# Altium PCB PCB1.PcbDoc
Units mm, origin at the board's own origin, x right, y up, seen from the top; angles counter-clockwise.
Board outline 30.37 x 71.9 mm, 2 copper layers (Top Layer, Bottom Layer); 9 components, 10 nets, 27 pads, 7 vias.
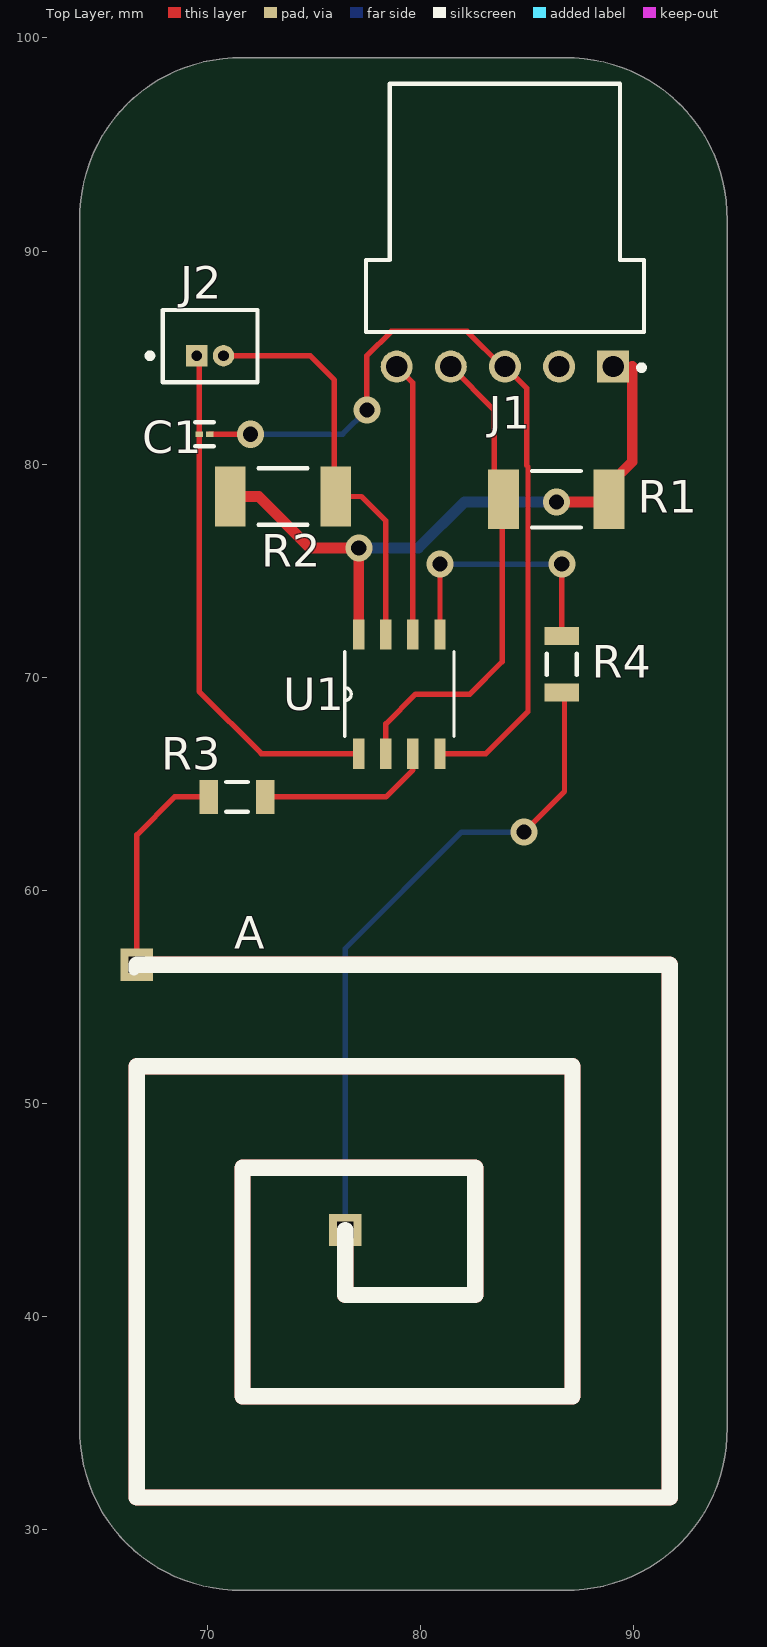
[diagram p0: Top Layer view]
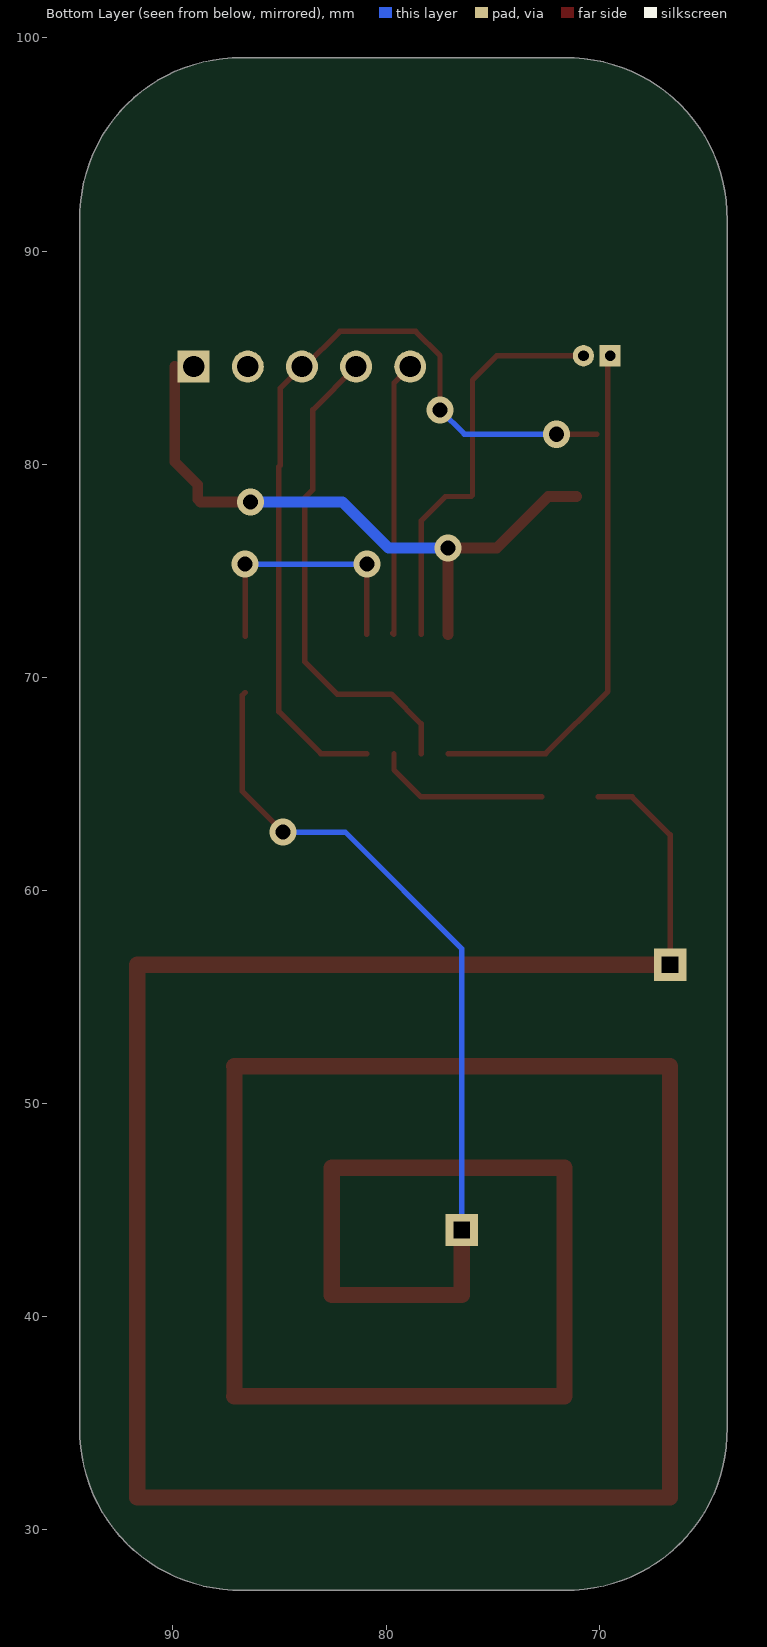
[diagram p1: Bottom Layer view, seen from below]
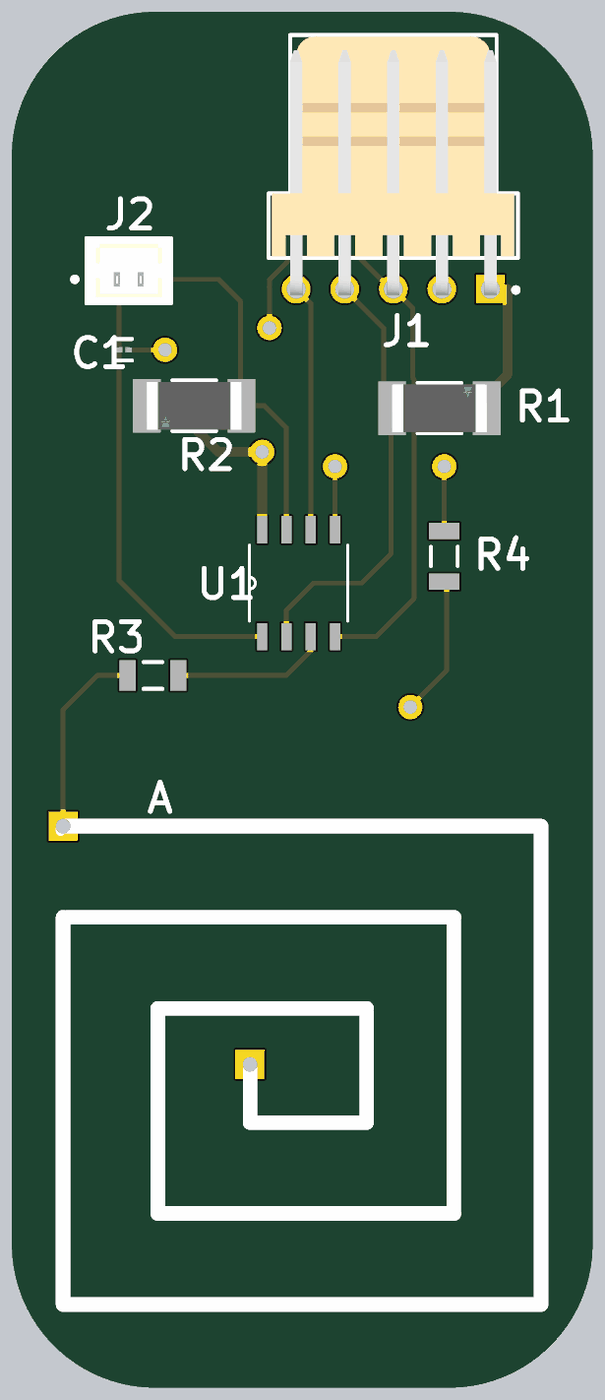
[diagram p2: 3D render of the assembled board from above, using the file's embedded part models]

## Layer stack, top to bottom
Top Solder: solder mask 0.0102, Solder Resist, Dk 3.5
Top Layer: signal copper 0.0356
Dielectric 1: dielectric 0.32, FR-4, Dk 4.8
Bottom Layer: signal copper 0.0356
Bottom Solder: solder mask 0.0102, Solder Resist, Dk 3.5

## Board outline
63.999,34.8 ccw(c71.501,34.671) 71.628,27.169 86.739,27.169 ccw(c86.868,34.671) 94.37,34.798 94.37,91.438 ccw(c86.868,91.567) 86.741,99.069 71.63,99.069 ccw(c71.501,91.567) 63.999,91.44

## Design rules (kind name [scope] priority, off if disabled: settings)
Clearance [All] p1: gap=0.254 ignorepadtopadclearanceinfootprint=FALSE except(0: Arc-Hole Track-Hole SMDPad-Hole THPad-Hole Via-Hole Fill-Hole Poly-Hole Region-Hole Text-Hole)
PolygonConnect [All] p1: connectstyle=Relief reliefconductorwidth=0.254 reliefentries=4 polygonreliefangle="90 Angle" airgapwidth=0.254
RoutingVias [All] p1: holewidth=0.711 width=1.27 viastyle="Through Hole" minholewidth=0.711 minwidth=1.27 maxholewidth=0.711 maxwidth=1.27
SolderMaskExpansion [All] p1: expansion=0.102 istentingtop=FALSE
Width [All] p1: maxlimit=0.254 minlimit=0.254 preferedwidth=0.254
30 further rules are at their usual default settings.

## Components (designator, comment, footprint, x,y, rotation, side; value= is the part's Value field where it differs from the comment)
A "Antena" Antena2 66.675,56.515 r0 top
C1 "CL03B103KQ3NNNC" FP-CL03-IPC_C 69.85,81.407 r180 top
J1 "61900511021" 61900511021 83.947,92.032 r180 top
J2 "53047-0210" FP-53047-0210-MFG 70.114,85.54 r180 top
R1 "CRCW201020K0FKEF" FP-CRCW2010-e3-MFG 86.36,78.359 r0 top
R2 "CRCW201020K0FKEF" FP-CRCW2010-e3-MFG 73.533,78.486 r180 top
R3 "RC1206FR-071RL" RESC3116X65X40LL10T20 71.374,64.389 r180 top
R4 "RC1206FR-071RL" RESC3116X65X40LL10T20 86.614,70.612 r270 top
U1 "M24LR64-RMN6/2" SOIC127P600X175-8N 78.994,69.215 r90 top

## Footprints (in the part's own frame and the unit in brackets; to place one, negate y for a bottom-side part, rotate by r counter-clockwise, add the part's x,y. Pads: shape width x height; smd on the part's side, far side on the other; paste and mask are expansions set on the pad)
61900511021 [mm] "2.54mm Male Left Angled Header Bottom Locking, 5p"
  rect 1.5x1.5 hole 1: 1(-5.08,7.45)
  round 1.5 hole 1: 2(-2.54,7.45) 3(0,7.45) 4(2.54,7.45) 5(5.08,7.45)
  silkscreen extent -6.54,-5.82 6.52,7.62, body extent -6.35,-5.75 6.35,7.77, height 5.83
Antena2 [mil]
  rect 60x60 hole 30 square: 1(0,0) 2(385,-490)
  Top Layer lines w30: 0,0 984.25,0 984.25,-984.25 0,-984.25 0,-187.5 804.63,-187.5 ; 385,-490 385,-610 625,-610 625,-375 195,-375 195,-797.13 805,-797.13 ; 804.63,-795 804.63,-187.5 ; 805,-187.5 804.63,-187.5
  silkscreen extent -5,-984 984,0
FP-53047-0210-MFG [mm]
  rect 1x1 hole 0.5 paste-1000 mask+0: 1(0.625,0.45)
  round 1 hole 0.5 paste-1000 mask+0: 2(-0.625,0.45)
  silkscreen extent -2.22,-1.7 2.95,1.7, body extent -2.32,-1.8 2.32,1.8, height 0.25
FP-CL03-IPC_C [mm]
  rect 0.354x0.263 smd paste+0 mask+0: 1(-0.254,0) 2(0.254,0)
  silkscreen extent -0.43,-0.57 0.43,0.57, body extent -0.53,-0.27 0.53,0.27, height 0.25
FP-CRCW2010-e3-MFG [mm]
  rect 1.45x2.8 smd paste+0 mask+0: 1(-2.475,0) 2(2.475,0)
  silkscreen extent -1.14,-1.33 1.14,1.33, body extent -3.3,-1.5 3.3,1.5, height 0.25
RESC3116X65X40LL10T20 [mm] "Chip Resistor, 2-Leads, Body 3.10x1.60mm, IPC High Density"
  rect 0.85x1.6 smd: 1(-1.325,0) 2(1.325,0)
  silkscreen extent -0.5,-0.7 0.5,0.7, body extent -1.6,-0.85 1.6,0.85, height 0.65
SOIC127P600X175-8N [mil]
  rect 56x21 smd: 1(-110,75) 2(-110,25) 3(-110,-25) 4(-110,-75) 5(110,-75) 6(110,-25) 7(110,25) 8(110,75)
  silkscreen extent -78,-101 78,101

## Part data
C1: library part CMP-2010-00307-2, "Cap Ceramic 10nF 6.3V X7R ±10% Pad SMD 0201 +125°C T/R", Capacitance=10nF, Case/Package=0201, Case Code (Metric)=0603, Dielectric=X7R, Max Operating Temperature=125°C, Min Operating Temperature=-55°C, Package Quantity=1, Tolerance=10%, Voltage Rating=6.3V, Case Code (Imperial)=0201, Depth=0.3mm, Height=0.3mm, Length=0.6mm, Mount="Surface Mount", Packaging="Tape and Reel", Radiation Hardening=No, Thickness=0.013inch, Width=0.012inch
J1: library part CMP-1502-00595-1, "Male Bottom Locking Header WR-WTB, THT, Right Angled, pitch 2.54 mm, 1 x 5 position", Contact Resistance=20mOhm, Manufacturer="Wurth Elektronik", Operating Temperature=-40to105degC, Working Voltage=250VAC, Datasheet URL=https://katalog.we-online.de/em/datasheet/6190xx11021.pdf, Gender=Male, Manufacturer URL=http://www.we-online.de, Mounting Technology=THT, Orientation=RightAngled, Package Reference=61900511021, Packaging=Bag, Part Number=61900511021, Pitch=2.54mm, Position=1x5, Publisher=WurthElektronik
J2: library part CMP-2000-05628-3, "CONN HEADER VERT 2POS 1.25MM", Ambient Temperature Range High=+85°C, Ambient Temperature Range Low=-40°C, Current Rating=1A, Manufacturer=Molex, Package=0, Temperature="-40°C to +85°C", Voltage Rating=125V, Automotive=No, Category=Conn, ComponentLink2Description=Datasheet, ComponentLink2URL=http://www.molex.com/webdocs/datasheets/pdf/en-us/0530470210_PCB_HEADERS.pdf, Conn Gender=Male, Conn Orientation=Vertical, Contact Material=Tin, Device Class L1=Connectors, Device Class L2="Headers and Wire Housings", Device Class L3=unset, Digikey Description="CONN HEADER VERT 2POS 1.25MM", Footprint Url=https://www.molex.com/pdm_docs/sd/530470210_sd.pdf, Height=4.4mm, Lead Free=Yes, Manufacturer Part Number=53047-0210, Mouser Description="1.25mm Pitch PicoBlade™ Wire-to-Board Header, Vertical, with Friction Lock, 2 Circuits", Number Of Contacts=2, Number Of Rows=1, Octopart=https://octopart.com/53047-0210-molex-276772, Pitch=1.25mm, RoHS=TRUE, Temperature Range High=+85°C, Temperature Range Low=-40°C
R1 R2: library part CMP-1017-00655-2, "RES Thick Film, 20kΩ, 1%, 0.75W, 100ppm/°C, 2010", Case/Package=2010, Case Code (Metric)=5025, Max Operating Temperature=155°C, Max Power Dissipation=750mW, Min Operating Temperature=-55°C, Package Quantity=1, Resistance=20kR, Temperature Coefficient=100ppm/°C, Tolerance=1%, Voltage Rating=400V, Case Code (Imperial)=2010, Composition="Thick Film", Contact Plating=Tin, Depth=2.5mm, Features="Automotive AEC-Q200", Height=0.028inch, Lead Free="Lead Free", Length=5mm, Military Standard=Not, Number of Pins=2, Number of Terminations=2, Packaging="Tape and Reel", Power Rating=750mW, Radiation Hardening=No, Voltage Rating (DC)=400V, Weight=0.000899oz, Width=0.098inch
R3: library part CMP-2000-06967-1, "Chip Resistor, 1 Ohm, +/- 1%, 250 mW, -55 to 155 degC, 1206 (3216 Metric), RoHS, Tape and Reel", Case Code - in=1206, Case Code - mm=3216, Manufacturer=Yageo, Operating Temperature Range=-55Cto+155C, Package Description="2-Pin Surface Mount Device, Body 3.1 x 1.6 mm", Power Rating=250mW(1/4W), Resistance=0Ohms, Temperature Coefficient=200PPM/C, Tolerance=1%, Voltage Rating=200V, Datasheet URL=http://www.yageo.com/documents/recent/PYu-RC_Group_51_RoHS_L_7.pdf, Datasheet Version="Rev. 7, 05/2017", Manufacturer URL=http://www.yageo.com/, Mounting Technology=SurfaceMount, Package Reference=1206, Packaging=Reel, Product=ThickFilmResistorsGeneralPurpose, Series=RC, Termination Style=SMD/SMT
R4: library part CMP-2000-06967-1, "Chip Resistor, 1 Ohm, +/- 1%, 250 mW, -55 to 155 degC, 1206 (3216 Metric), RoHS, Tape and Reel", Case Code - in=1206, Case Code - mm=3216, Manufacturer=Yageo, Operating Temperature Range=-55Cto+155C, Package Description="2-Pin Surface Mount Device, Body 3.1 x 1.6 mm", Power Rating=250mW(1/4W), Resistance=0, Temperature Coefficient=200PPM/C, Tolerance=1%, Voltage Rating=200V, Datasheet URL=http://www.yageo.com/documents/recent/PYu-RC_Group_51_RoHS_L_7.pdf, Datasheet Version="Rev. 7, 05/2017", Manufacturer URL=http://www.yageo.com/, Mounting Technology=SurfaceMount, Package Reference=1206, Packaging=Reel, Product=ThickFilmResistorsGeneralPurpose, Series=RC, Termination Style=SMD/SMT
U1: "64 Kbit EEPROM", Package=None, Availability=Unavailable, MP=M24LR64-RMN6-2, Price=None

## Via types
v1: diameter 1.27, hole 0.711, Top Layer to Bottom Layer, 7 vias

## Nets (pads, with @x,y where several pads share a name; then routed paths per layer and width w, separated by ;. In a path a pad name is that pad's centre, name@x,y a point inside that pad or via, vN(x,y) a via of type N, cw(c..) or ccw(c..) an arc to the next point about the centre after c; other vN are vias at no path point)
GND: C1.1 J1.3 U1.4 | length 39.6
  Top Layer w0.254: C1.1 v1(72.009,81.407) ; v1(77.47,82.55) 77.47,85.09 78.613,86.233 82.169,86.233 83.82,84.582 J1.3 84.963,83.566 84.963,79.945 85.026,79.881 85.026,68.389 83.058,66.421 U1.4
  Bottom Layer w0.254: v1(72.009,81.407) 76.327,81.407 v1(77.47,82.55)
NetA_1: A.1 R3.2 | length 10.2
  Top Layer w0.254: A.1 66.675,62.611 68.453,64.389 R3.2
NetA_2: A.2 R4.2 | length 31.2
  Top Layer w0.254: v1(84.836,62.738) 86.741,64.643 86.741,69.16 R4.2
  Bottom Layer w0.254: A.2 76.454,57.277 81.915,62.738 v1(84.836,62.738)
NetC1_2: C1.2 J2.1 U1.1 | length 24.5
  Top Layer w0.254: J2.1 69.596,84.983 C1.2 69.596,69.342 72.517,66.421 U1.1
NetJ1_4: J1.4 R1.1 U1.2 | length 23
  Top Layer w0.254: U1.2 78.359,67.818 79.756,69.215 82.296,69.215 83.82,70.739 83.82,78.294 R1.1 83.439,78.805 83.439,82.55 J1.4
NetJ2_2: J2.2 R2.1 U1.7 | length 19.3
  Top Layer w0.254: J2.2 74.803,85.09 75.946,83.947 75.946,78.548 R2.1 77.216,78.486 78.359,77.343 U1.7
NetR3_1: R3.1 U1.3 | length 8.2
  Top Layer w0.254: R3.1 78.359,64.389 79.629,65.659 U1.3
NetR4_1: R4.1 U1.5 | length 12.4
  Top Layer w0.254: U1.5 v1(80.899,75.311) ; R4.1 v1(86.614,75.311)
  Bottom Layer w0.254: v1(80.899,75.311) v1(86.614,75.311)
SCL: J1.5 U1.6 | length 13
  Top Layer w0.254: J1.5 79.629,83.82 U1.6 U1.6@79.692,72.072
VCC: J1.1 R1.2 R2.2 U1.8 | length 30.5
  Top Layer w0.508: R2.2 72.392,78.486 74.805,76.073 v1(77.089,76.073) U1.8 ; v1(86.36,78.232) 88.708,78.232 R1.2 88.835,79.034 89.916,80.115 89.916,84.582
  Bottom Layer w0.508: v1(77.089,76.073) 79.883,76.073 82.042,78.232 v1(86.36,78.232)
pads on no net: J1.2

## Silkscreen, mask and mechanical layers (free items; w line width, h text height)
Mechanical 1:
  lines w0.254: 63.999,34.8 ccw(c71.501,34.671) 71.628,27.169 ; 63.999,91.44 cw(c71.501,91.567) 71.63,99.069 ; 86.739,27.169 ccw(c86.868,34.671) 94.37,34.798 ; 86.741,99.069 cw(c86.868,91.567) 94.37,91.438
  lines w0.508: 63.999,34.807 63.999,91.44 ; 71.503,98.942 86.614,98.942 ; 71.628,27.169 86.739,27.169 ; 94.37,34.798 94.37,91.438